# EAGLE board zeta2rework_lw_v35_rework (EAGLE 9.3.1)
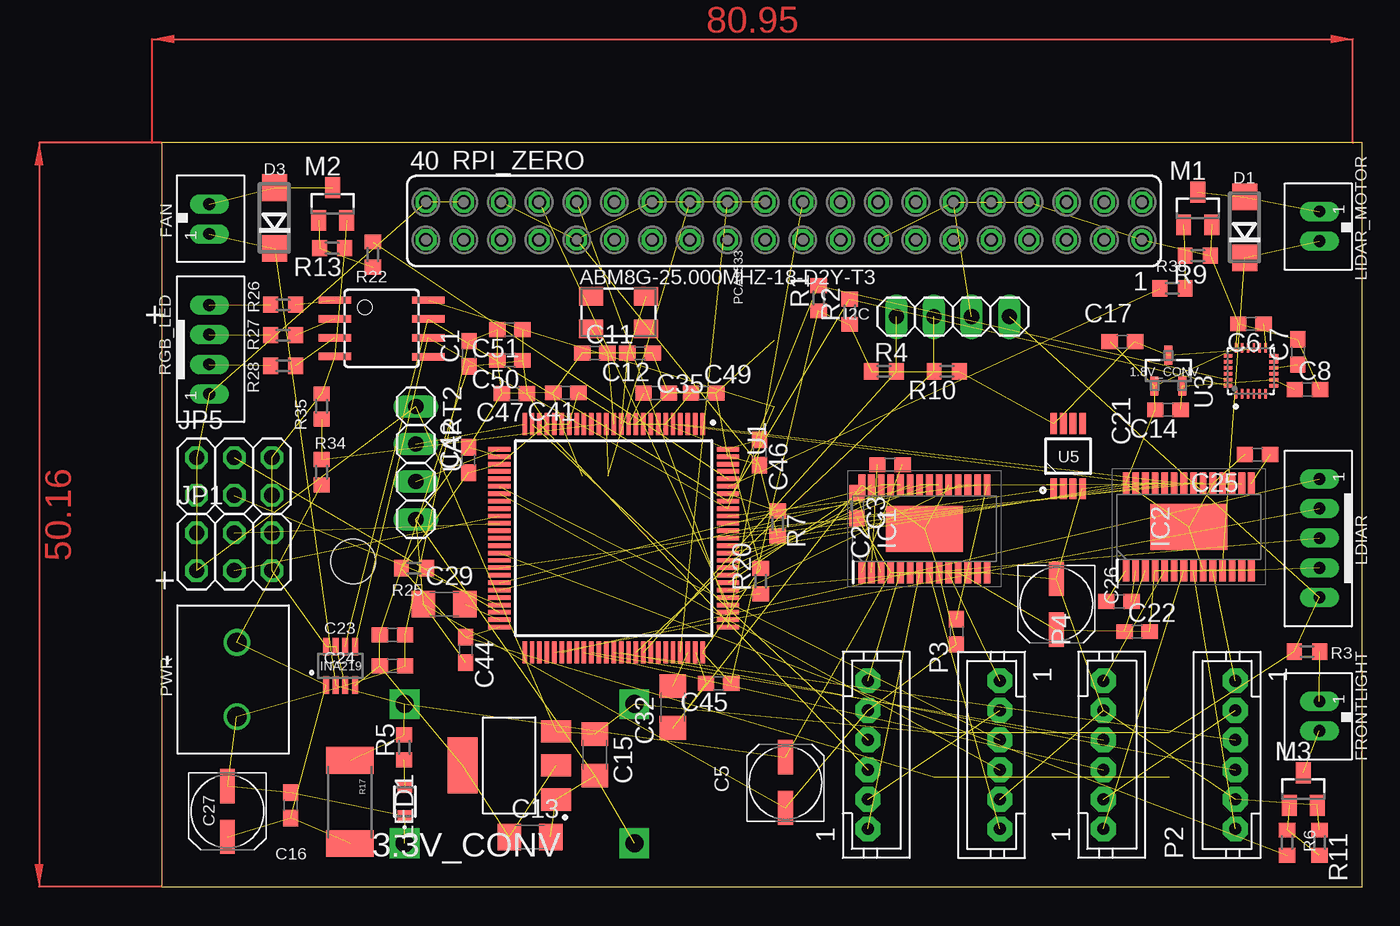
[diagram p0: board, top side]
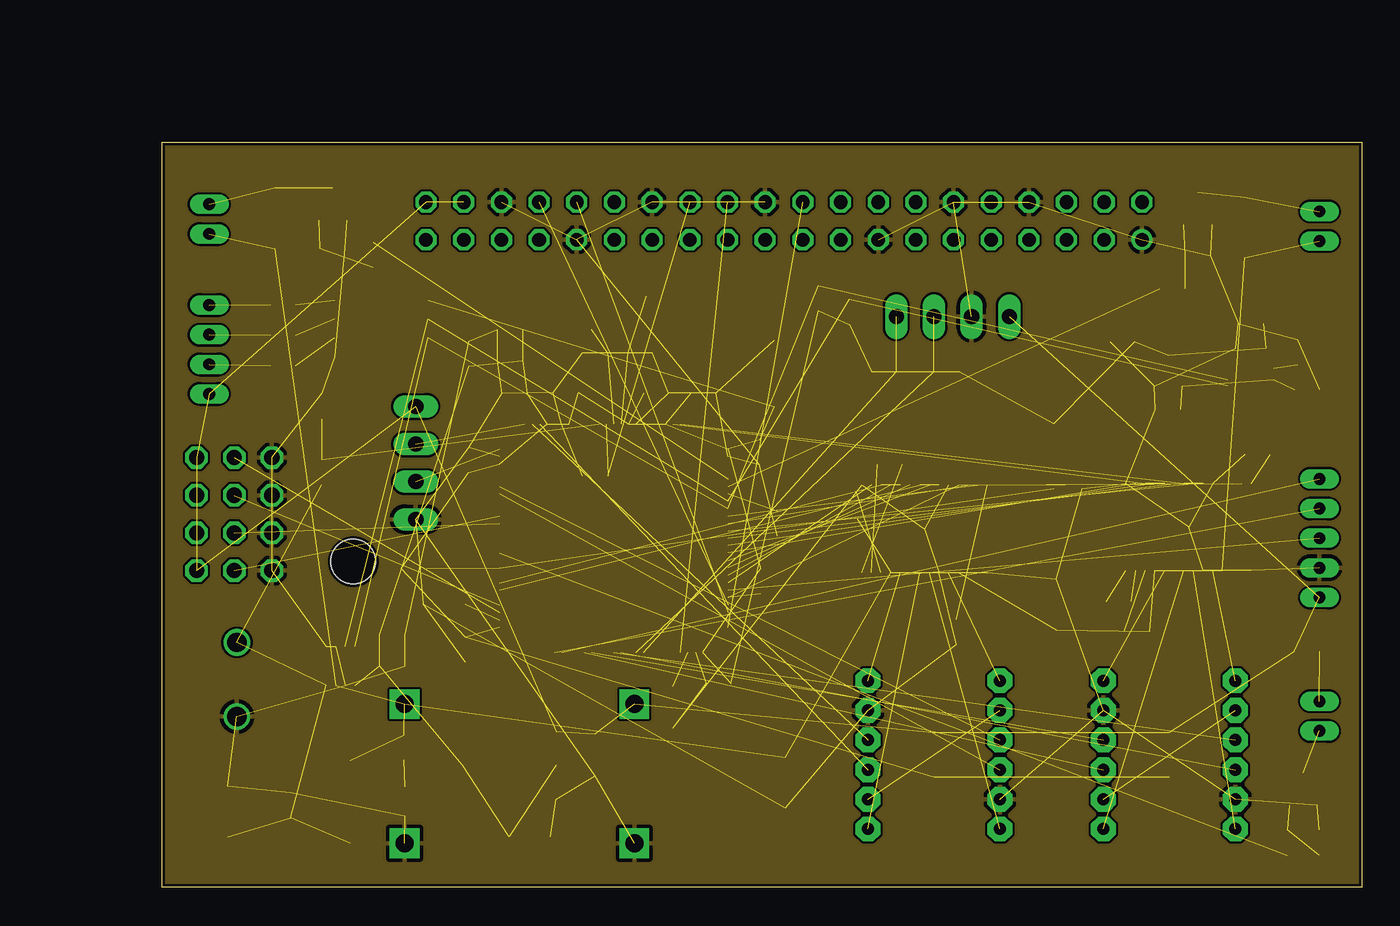
[diagram p1: board, inner layer Route2]
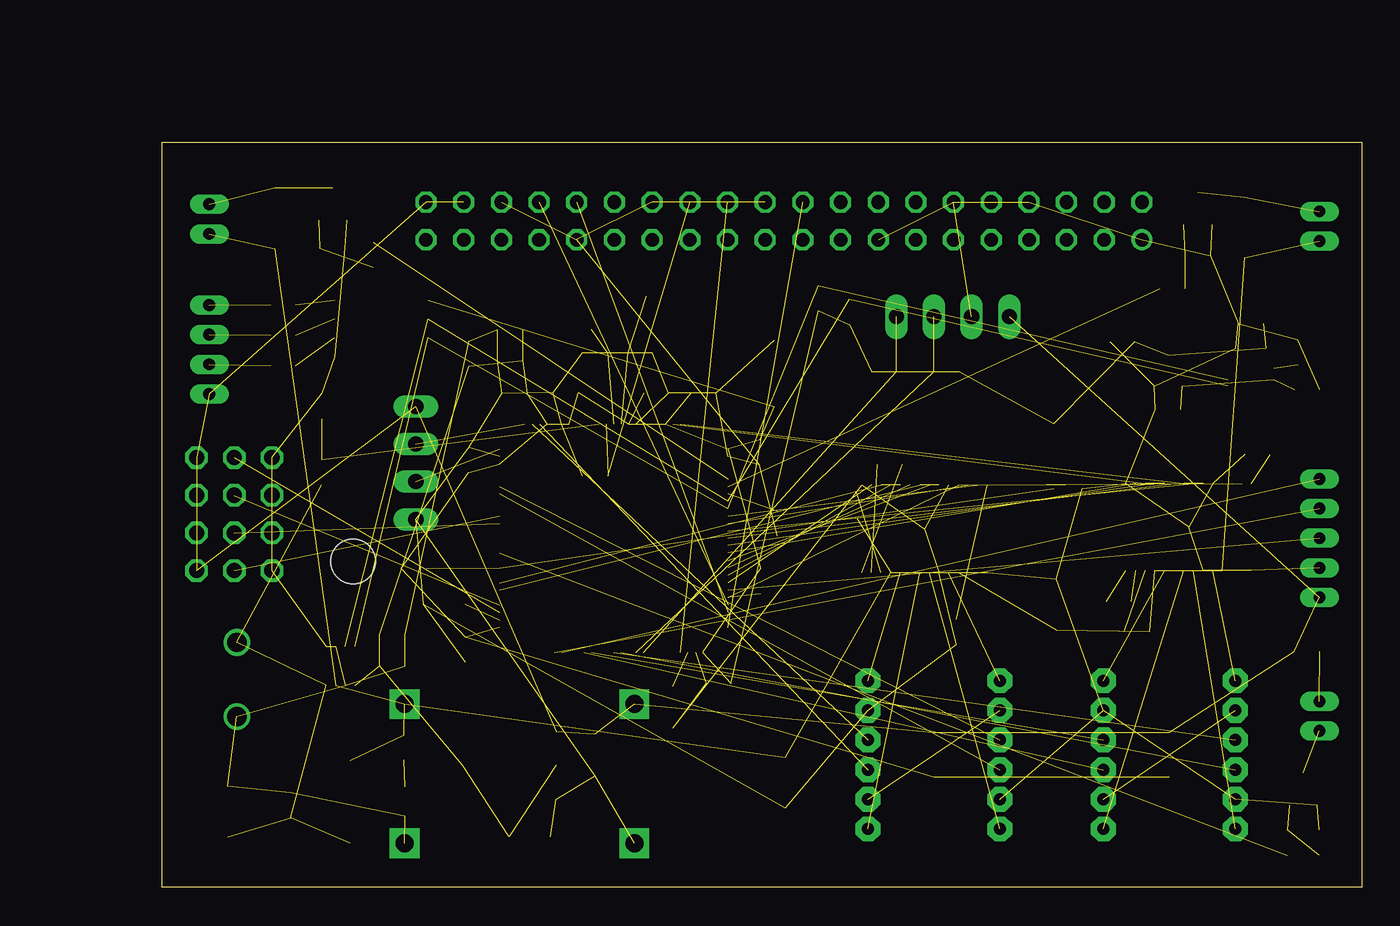
[diagram p2: board, inner layer Route15]
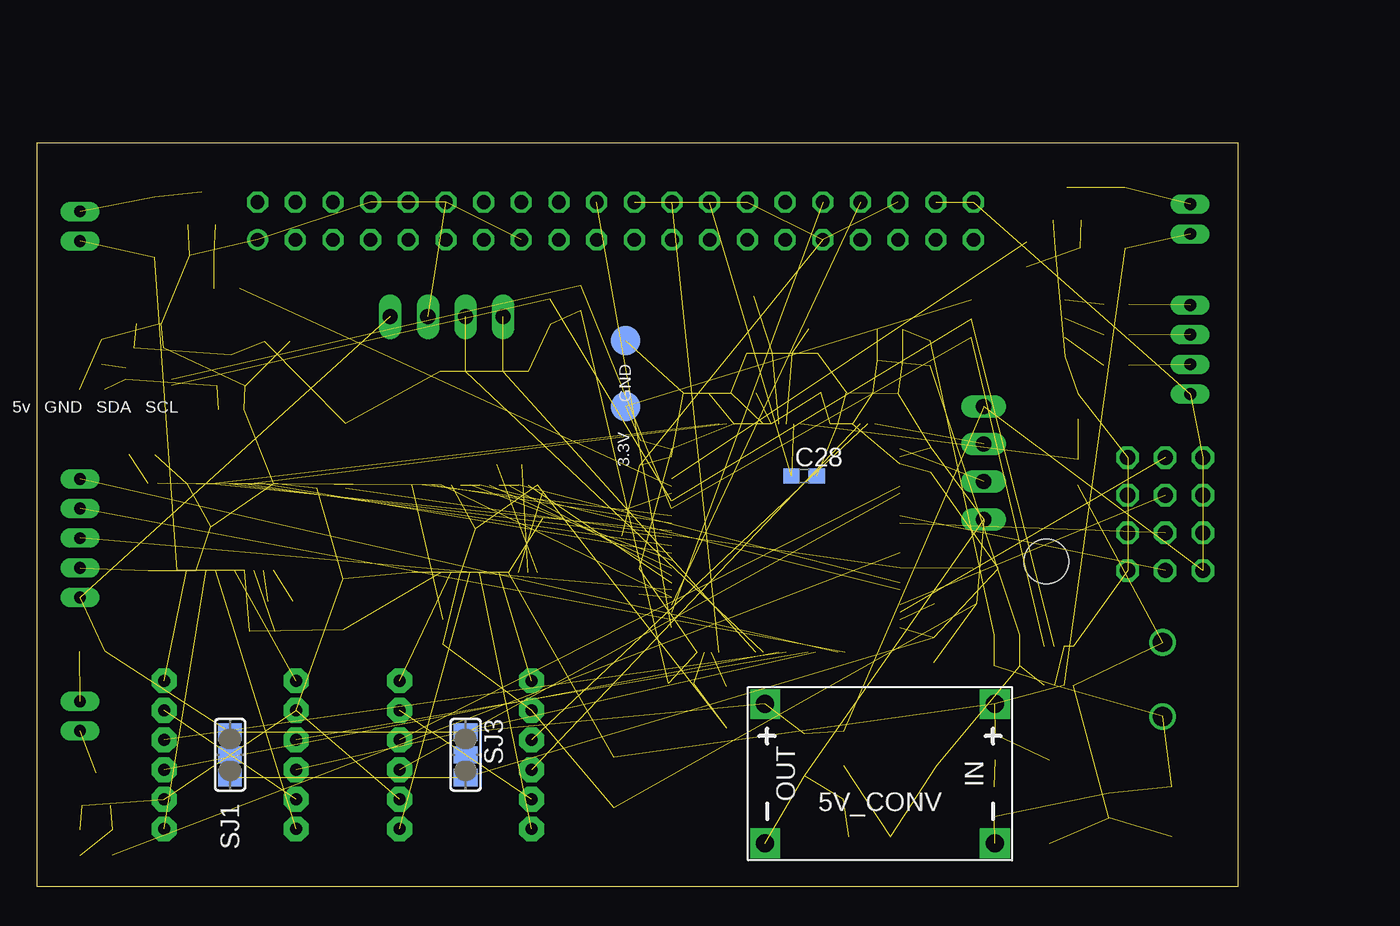
[diagram p3: board, bottom side, seen from below]

Size 80.95 x 50.16 mm. Coordinates in mm from the lower left corner, seen from the top.
Outline: 0,0 80.95,0 80.95,50.16 0,50.16 0,0
Copper layers (1*2*15*16): Top 0.035mm / dielectric 0.2mm / Route2 0.018mm / dielectric 1.5mm / Route15 0.018mm / dielectric 0.2mm / Bottom 0.035mm
Design rules "aisler_4_layer": minimum track width 0.1mm, minimum drill 0.2mm, track to track 0.1mm, track to pad 0.1mm, pad to pad 0.1mm, via to via 0.1mm, smd to smd 0.1mm, copper to edge 0.2mm, drill to drill 0.21mm, minimum pad ring 0.25mm, minimum via ring 0.15mm, stop-mask expansion 0mil, vias tented up to drill 0mil, thermal gap 10mil
Net classes: 0 default: clearance 0.152 mm
Holes 3 mm at 12.93,21.92

## Footprints (pad centres in the part's own frame; a part is rotated, then mirrored left to right if it is on the bottom)
SOT95P237X112-3N = smd 0.559 x 1.27: 1 -0.94,-1.041; 2 0.94,-1.041; 3 0,1.041
TP20R = smd 2 x 2: TP 0,0
SOT230P700X175-4N = smd 2 x 1.5: 1 -3.15,2.3; 2 -3.15,0; 3 -3.15,-2.3 | smd 2 x 3.8: 4 3.15,0
DC-DC-STEP-DOWN-MP2307 = drill 1.2 pad 2 square: IN+ -7.747,-4.699; IN- -7.747,4.699; OUT+ 7.747,-4.699; OUT- 7.747,4.699
5.0X3.2_KX-9A = smd 1.6 x 1.25: 1 -1.85,-1.1; 2 1.85,-1.1; 3 1.85,1.1; 4 -1.85,1.1
C0603 = smd 1.1 x 1: 1 -0.85,0; 2 0.85,0
UD-5X5,8_NICHICON = smd 2.3 x 1: + 1.725,0; - -1.7,0
C1206 = smd 1.6 x 1.8: 1 -1.4,0; 2 1.4,0
DO214AC = smd 1.8 x 1.7: A 2.05,0; C -2.05,0
JST_B2B-PH_HEADER = drill 0.8 long: P1 1.075,0.048; P2 -0.925,0.048
1X04 = drill 1.016 long: 1 -3.81,0; 2 -1.27,0; 3 1.27,0; 4 3.81,0
SOP65P640X120-29N = smd 1.475 x 0.45: 1 -2.938,4.225; 2 -2.938,3.575; 3 -2.938,2.925; 4 -2.938,2.275; 5 -2.938,1.625; 6 -2.938,0.975; 7 -2.938,0.325; 8 -2.938,-0.325; 9 -2.938,-0.975; 10 -2.938,-1.625; 11 -2.938,-2.275; 12 -2.938,-2.925; 13 -2.938,-3.575; 14 -2.938,-4.225; 15 2.938,-4.225; 16 2.938,-3.575; 17 2.938,-2.925; 18 2.938,-2.275; 19 2.938,-1.625; 20 2.938,-0.975; 21 2.938,-0.325; 22 2.938,0.325; 23 2.938,0.975; 24 2.938,1.625; 25 2.938,2.275; 26 2.938,2.925; 27 2.938,3.575; 28 2.938,4.225 | smd 3.1 x 5.18: 29 0,0
SOT23-8 = smd 0.4 x 1.2: 1 -0.975,-1.3; 2 -0.325,-1.3; 3 0.325,-1.3; 4 0.975,-1.3; 5 0.975,1.3; 6 0.325,1.3; 7 -0.325,1.3; 8 -0.975,1.3
2X03 = drill 1.016 octagon: 1 -2.54,-1.27; 2 -2.54,1.27; 3 0,-1.27; 4 0,1.27; 5 2.54,-1.27; 6 2.54,1.27
JST_B5B-PH_HEADER = drill 0.8 long: P1 4,0.048; P2 2,0.048; P3 0,0.048; P4 -2,0.048; P5 -4,0.048
LTM673-N1R2-25 = smd 0.8 x 1: 1 -1,0; 2 1,0
SOT23 = smd 1 x 1.4: 1 -0.95,-1.1; 2 0.95,-1.1; 3 0,1.1
JST-PH6 = drill 0.813 pad 1.676 octagon: 1 5,0; 2 3,0; 3 1,0; 4 -1,0; 5 -3,0; 6 -5,0
SOIC8 = smd 0.5 x 2.2: 1 -1.905,-3.154; 2 -0.645,-3.154; 3 0.625,-3.154; 4 1.895,-3.154; 5 1.905,3.154; 6 0.635,3.154; 7 -0.635,3.154; 8 -1.905,3.154
691137710002 = drill 1.3: 1 -2.5,0; 2 2.5,0
R0603 = smd 1 x 1.1: 1 -0.85,0; 2 0.85,0
2512 = smd 1.8 x 3.2: 1 -2.8,0; 2 2.8,0
JST_B4B-PH_HEADER = drill 0.8 long: P1 2.98,0.048; P2 0.98,0.048; P3 -1.02,0.048; P4 -3.02,0.048
FE20-2 = drill 0.914: 1 -24.13,1.27 | drill 0.914 octagon: 2 -24.13,-1.27; 3 -21.59,1.27; 4 -21.59,-1.27; 5 -19.05,1.27; 6 -19.05,-1.27; 7 -16.51,1.27; 8 -16.51,-1.27; 9 -13.97,1.27; 10 -13.97,-1.27; 11 -11.43,1.27; 12 -11.43,-1.27; 13 -8.89,1.27; 14 -8.89,-1.27; 15 -6.35,1.27; 16 -6.35,-1.27; 17 -3.81,1.27; 18 -3.81,-1.27; 19 -1.27,1.27; 20 -1.27,-1.27; 21 1.27,1.27; 22 1.27,-1.27; 23 3.81,1.27; 24 3.81,-1.27; 25 6.35,1.27; 26 6.35,-1.27; 27 8.89,1.27; 28 8.89,-1.27; 29 11.43,1.27; 30 11.43,-1.27; 31 13.97,1.27; 32 13.97,-1.27; 33 16.51,1.27; 34 16.51,-1.27; 35 19.05,1.27; 36 19.05,-1.27; 37 21.59,1.27; 38 21.59,-1.27; 39 24.13,1.27; 40 24.13,-1.27
SJ_2 = smd 1.168 x 1.6: 1 -1.524,0; 2 0,0; 3 1.524,0
QFP50P1600X1600X160-100N = smd 1.5 x 0.3: 1 -7.7,6; 2 -7.7,5.5; 3 -7.7,5; 4 -7.7,4.5; 5 -7.7,4; 6 -7.7,3.5; 7 -7.7,3; 8 -7.7,2.5; 9 -7.7,2; 10 -7.7,1.5; 11 -7.7,1; 12 -7.7,0.5; 13 -7.7,0; 14 -7.7,-0.5; 15 -7.7,-1; 16 -7.7,-1.5; 17 -7.7,-2; 18 -7.7,-2.5; 19 -7.7,-3; 20 -7.7,-3.5; 21 -7.7,-4; 22 -7.7,-4.5; 23 -7.7,-5; 24 -7.7,-5.5; 25 -7.7,-6; 51 7.7,-6; 52 7.7,-5.5; 53 7.7,-5; 54 7.7,-4.5; 55 7.7,-4; 56 7.7,-3.5; 57 7.7,-3; 58 7.7,-2.5; 59 7.7,-2; 60 7.7,-1.5; 61 7.7,-1; 62 7.7,-0.5; 63 7.7,0; 64 7.7,0.5; 65 7.7,1; 66 7.7,1.5; 67 7.7,2; 68 7.7,2.5; 69 7.7,3; 70 7.7,3.5; 71 7.7,4; 72 7.7,4.5; 73 7.7,5; 74 7.7,5.5; 75 7.7,6 | smd 0.3 x 1.5: 26 -6,-7.7; 27 -5.5,-7.7; 28 -5,-7.7; 29 -4.5,-7.7; 30 -4,-7.7; 31 -3.5,-7.7; 32 -3,-7.7; 33 -2.5,-7.7; 34 -2,-7.7; 35 -1.5,-7.7; 36 -1,-7.7; 37 -0.5,-7.7; 38 0,-7.7; 39 0.5,-7.7; 40 1,-7.7; 41 1.5,-7.7; 42 2,-7.7; 43 2.5,-7.7; 44 3,-7.7; 45 3.5,-7.7; 46 4,-7.7; 47 4.5,-7.7; 48 5,-7.7; 49 5.5,-7.7; 50 6,-7.7; 76 6,7.7; 77 5.5,7.7; 78 5,7.7; 79 4.5,7.7; 80 4,7.7; 81 3.5,7.7; 82 3,7.7; 83 2.5,7.7; 84 2,7.7; 85 1.5,7.7; 86 1,7.7; 87 0.5,7.7; 88 0,7.7; 89 -0.5,7.7; 90 -1,7.7; 91 -1.5,7.7; 92 -2,7.7; 93 -2.5,7.7; 94 -3,7.7; 95 -3.5,7.7; 96 -4,7.7; 97 -4.5,7.7; 98 -5,7.7; 99 -5.5,7.7; 100 -6,7.7
QFN40P300X300X105-25N = smd 0.64 x 0.22: 1 -1.545,1; 2 -1.545,0.6; 3 -1.545,0.2; 4 -1.545,-0.2; 5 -1.545,-0.6; 6 -1.545,-1; 13 1.545,-1; 14 1.545,-0.6; 15 1.545,-0.2; 16 1.545,0.2; 17 1.545,0.6; 18 1.545,1 | smd 0.22 x 0.64: 7 -1,-1.545; 8 -0.6,-1.545; 9 -0.2,-1.545; 10 0.2,-1.545; 11 0.6,-1.545; 12 1,-1.545; 19 1,1.545; 20 0.6,1.545; 21 0.2,1.545; 22 -0.2,1.545; 23 -0.6,1.545; 24 -1,1.545
SOP65P490X95-8N = smd 1.4 x 0.45: 1 -2.2,0.975; 2 -2.2,0.325; 3 -2.2,-0.325; 4 -2.2,-0.975; 5 2.2,-0.975; 6 2.2,-0.325; 7 2.2,0.325; 8 2.2,0.975

## Placement (x,y rotation side)
1.8V_CONV  MCP1700T-1802E/TT  [SOT95P237X112-3N]  67.87,34.8 0 top
3.3V  TPSQTP20R  [TP20R]  41.27,32.38 90 bottom
3.3V_CONV  NCP1117LPST33T3G  [SOT230P700X175-4N]  23.44,8.18 180 top
5V_CONV  DC-DC-STEP-DOWN-MP2307  [DC-DC-STEP-DOWN-MP2307]  24.13,7.62 180 bottom
ABM8G-25.000MHZ-18-D2Y-T3  25mhz  [5.0X3.2_KX-9A]  30.81,38.71 0 top
C1  4.7µf  [C0603]  20.73,35.94 90 top
C2  0.01µf 100v  [C0603]  49.11,28.45 180 top
C3  0.1µF 16v  [C0603]  46.89,25.69 270 top
C4  0.47µF 6.3v  [C0603]  53.59,17.18 270 top
C5  47µF  [UD-5X5,8_NICHICON]  42.06,7.01 90 top
C6  0.1nF  [C0603]  73.43,37.95 180 top
C7  0.1nF  [C0603]  76.61,36.05 90 top
C8  0.1nF  [C0603]  77.24,33.51 0 top
C11  Xpf  [C0603]  29.21,35.97 0 top
C12  Xpf  [C0603]  32.26,35.97 180 top
C13  10µF  [C1206]  24.84,3.35 0 top
C14  1µF  [C0603]  67.84,32.16 180 top
C15  10µF  [C1206]  29.21,8.89 270 top
C16  0.1µF  [C0603]  8.71,5.49 90 top
C17  1µF  [C0603]  64.77,36.75 180 top
C21  0.01µf 100v  [C0603]  64.54,19.23 0 top
C22  0.1µF 16v  [C0603]  65.76,17.2 0 top
C23  100nf  [C0603]  15.57,16.97 0 top
C24  0.1µF  [C0603]  15.57,14.88 0 top
C25  0.47µF 6.3v  [C0603]  73.88,29.13 180 top
C26  47µF  [UD-5X5,8_NICHICON]  60.33,19.05 270 top
C27  100µF  [UD-5X5,8_NICHICON]  4.45,5.08 270 top
C28  100nF  [C0603]  29.25,27.69 0 bottom
C29  2.2µf Low ESR < 2ohm  [C1206]  19.05,19.05 0 top
C32  2.2µf Low ESR < 2ohm  [C1206]  34.47,12.12 90 top
C35  100nF  [C0603]  33.34,33.27 0 top
C41  100nF  [C0603]  27.25,33.3 180 top
C42  100nF  [C0603]  20.7,28.77 90 top
C44  100nF  [C0603]  20.5,15.96 270 top
C45  100nF  [C0603]  37.55,13.72 180 top
C46  100nF  [C0603]  40.31,29.27 270 top
C47  100nF  [C0603]  23.79,33.25 180 top
C49  100nF  [C0603]  36.54,33.27 0 top
C50  100nF  [C0603]  23.48,35.48 180 top
C51  1µf  [C0603]  23.48,37.57 180 top
D1  1N4004 SMD  [DO214AC]  73.03,44.45 90 top
D3  1N4004 SMD  [DO214AC]  7.62,45.09 90 top
FAN  JST-PH_2-PIN_HEADER  [JST_B2B-PH_HEADER]  3.17,45.09 270 top
FRONTLIGHT  JST-PH_2-PIN_HEADER  [JST_B2B-PH_HEADER]  78.11,11.43 90 top
GND  TPSQTP20R  [TP20R]  41.27,36.83 90 bottom
I2C  [1X04]  53.34,38.43 0 top
IC1  DRV8844PWPR  [SOP65P640X120-29N]  51.44,24.13 90 top
IC2  DRV8844PWPR  [SOP65P640X120-29N]  69.24,24.26 90 top
INA219  INA219  [SOT23-8]  12.06,14.88 0 top
JP1  [2X03]  4.9,22.58 0 top
JP5  [2X03]  4.9,27.66 0 top
LDIAR  JST-PH_5-PIN_HEADER  [JST_B5B-PH_HEADER]  78.11,23.5 90 top
LED1  LT M673  [LTM673-N1R2-25]  16.41,5.74 90 top
LIDAR_MOTOR  JST-PH_2-PIN_HEADER  [JST_B2B-PH_HEADER]  78.11,44.45 90 top
M1  IRLML2502  [SOT23]  69.85,45.72 0 top
M2  IRLML2502  [SOT23]  11.53,46.02 0 top
M3  IRLML2502  [SOT23]  76.96,6.58 0 top
P1  [JST-PH6]  56.52,8.89 90 top
P2  [JST-PH6]  72.39,8.89 90 top
P3  [JST-PH6]  47.62,8.89 270 top
P4  [JST-PH6]  63.5,8.89 270 top
PCA9533  PCA9533  [SOIC8]  14.83,37.64 270 top
PWR  691137710002  [691137710002]  5.08,13.97 270 top
R1  10k  [R0603]  44.3,39.67 90 top
R2  10k  [R0603]  46.38,38.76 90 top
R3  0R  [R0603]  77.22,15.85 0 top
R4  10k  [R0603]  48.69,34.75 0 top
R5  390R  [R0603]  16.36,9.4 90 top
R6  22R  [R0603]  75.87,2.97 90 top
R7  10k  [R0603]  41.53,24.49 270 top
R9  100k  [R0603]  69.85,42.55 180 top
R10  10k  [R0603]  52.93,34.75 180 top
R11  100k  [R0603]  78.05,2.97 270 top
R13  100k  [R0603]  11.51,43.05 180 top
R17  0.1/1% (PT2512FK-070R1L)  [2512]  12.7,5.71 270 top
R20  100k  [R0603]  40.39,20.6 90 top
R22  22R  [R0603]  14.25,42.62 270 top
R25  4k7  [R0603]  17.02,21.46 180 top
R26  220R  [R0603]  8.2,39.24 180 top
R27  220R  [R0603]  8.2,37.19 180 top
R28  220R  [R0603]  8.2,35.13 180 top
R34  100k  [R0603]  10.79,27.94 270 top
R35  69k  [R0603]  10.79,32.38 270 top
R38  22R  [R0603]  68.15,40.34 0 top
RGB_LED  JST-PH_4-PIN_HEADER  [JST_B4B-PH_HEADER]  3.17,36.2 270 top
RPI_ZERO  [FE20-2]  41.96,44.88 180 top
SJ1  [SJ_2]  67.94,8.89 270 bottom
SJ3  [SJ_2]  52.07,8.89 270 bottom
U1  STM32F427VI  [QFP50P1600X1600X160-100N]  30.48,23.5 270 top
U3  ICM-20948  [QFN40P300X300X105-25N]  73.43,34.78 90 top
U5  DS18B20U+  [SOP65P490X95-8N]  61.11,29.03 90 top
UART2  [1X04]  17.14,28.58 270 top

## Library data of the parts
1.8V_CONV = MCP1700T-2102E_TT; AVAILABILITY: Unavailable; DESCRIPTION: 250mA CMOS LDO, Isupply 1uA and 2% VoutAccuracy; MF: Microchip; MP: MCP1700T-2102E/TT; PACKAGE: SOT-23 Microchip; PRICE: None
3.3V GND = testpad
3.3V_CONV = NCP1117LPST33T3G; AVAILABILITY: Unavailable; DESCRIPTION: Linear Voltage Regulator, Positive, LDO, 1.0 A _Fixed and Adjustable_ Vout: 3.3 V; MF: ON Semiconductor; MP: NCP1117LPST33T3G; PACKAGE: SOT-223 ON Semiconductor; PRICE: None
5V_CONV = diy-modules
ABM8G-25.000MHZ-18-D2Y-T3 = crystal-geyer_V1_0
C1-C8 C11-C17 C21-C29 C32 C35 C41 C42 C44-C47 C49-C51 = rcl; SPICEPREFIX: C
D1 D3 = diode
FAN FRONTLIGHT LDIAR LIDAR_MOTOR RGB_LED = srg
I2C JP1 JP5 UART2 = pinhead
IC1 IC2 = DRV8844PWPR; DESCRIPTION: 5A Brushed DC motor or Quad 1.75A Solenoid/Relay Driver with +/-30V split supply support (PWM Ctrl); HEIGHT: 1.2mm; MANUFACTURER_NAME: Texas Instruments; MANUFACTURER_PART_NUMBER: DRV8844PWPR; MOUSER_PART_NUMBER: 595-DRV8844PWPR; MOUSER_PRICE-STOCK: https://www.mouser.com/Search/Refine.aspx?Keyword=595-DRV8844PWPR
INA219 = INA219; AVAILABILITY: Unavailable; DESCRIPTION: the ina219 is a high-side current shunt and power monitor with an i2c interface. the ina219 monitors both shunt drop ...; MF: Texas Instruments; MP: INA219; PACKAGE: None; PRICE: None
LED1 = LT_M673-N1R2-25; DESCRIPTION: Osram Opto LT M673-N1R2-25, Mini TOPLED Series Green LED, 529 nm,, Rectangle Lens SMD Package; HEIGHT: mm; MANUFACTURER_NAME: OSRAM Opto Semiconductors; MANUFACTURER_PART_NUMBER: LT M673-N1R2-25; MOUSER_PART_NUMBER: 720-LTM673N1R225Z; MOUSER_PRICE-STOCK: https://www.mouser.com/Search/Refine.aspx?Keyword=720-LTM673N1R225Z; RS_PART_NUMBER: 9133231; RS_PRICE-STOCK: http://uk.rs-online.com/web/p/products/9133231
M1-M3 = IRLML2502TRPBF; AVAILABILITY: Unavailable; DESCRIPTION: Single N-Channel 20 V 0.08 Ohm 12 nC 1.25 W Silicon SMT Mosfet - SOT-23; MF: Infineon; MP: IRLML2502TRPBF; PACKAGE: SOT-23-3 Infineon; PRICE: None
P1-P4 = jst-ph
PCA9533 = adam - ics
PWR = term block; AVAILABILITY: Unavailable; DESCRIPTION: Term Block 2pos Side Entry 5mm; MF: Wurth Electronics; MP: 691137710002; PACKAGE: None; PRICE: None
R1-R7 R9-R11 R13 R20 R22 R25-R28 R34 R35 R38 = rcl; SPICEPREFIX: R
R17 = microbuilder
RPI_ZERO = con-lsta; OC_FARNELL: unknown; OC_NEWARK: unknown
SJ1 SJ3 = jumper
U1 = STM32F427VGT7; AVAILABILITY: Unavailable; DESCRIPTION: Ic Mcu 32bit 1mb Flash 100lqfp; MF: STMicroelectronics; MP: STM32F427VGT7; PACKAGE: LQFP-100 STMicroelectronics; PRICE: None
U3 = ICM-20948; AVAILABILITY: Unavailable; DESCRIPTION: 9 Axis=3 Axis Gyro+3 Axis Accel+Compass. Pin For Pin With m; MF: TDK InvenSense; MP: ICM-20948; PACKAGE: QFN-24 InvenSense; PRICE: None
U5 = DS18B20U_; AVAILABILITY: Unavailable; DESCRIPTION: Date Code: 1043+; RoHS Compliant: Yes;; MF: Maxim; MP: DS18B20U+; PACKAGE: TSSOP-8 Chip Coolers; PRICE: None

## Nets
+1.8V: 1.8V_CONV.2 C8.1 C14.1 U3.8
+3V3: 1.8V_CONV.3 3.3V.TP 3.3V_CONV.2 3.3V_CONV.4 C1.1 C6.1 C13.1 C17.1 C23.1 C24.1 C35.1 C41.1 C42.1 C44.1 C45.1 C46.1 C47.1 C49.1 C50.1 C51.1 INA219.4 PCA9533.8 R1.1 R2.1 R4.1 R10.1 R20.2 R25.2 SJ1.3 SJ3.3 U1.6 U1.11 U1.19 U1.21 U1.22 U1.28 U1.50 U1.75 U1.100 U3.13 U5.8
+5V: 3.3V_CONV.3 5V_CONV.OUT+ C15.1 I2C.4 JP1.1 JP1.2 JP5.1 JP5.2 LDIAR.P5 R3.1 RGB_LED.P1 RPI_ZERO.38 RPI_ZERO.40 SJ1.1 SJ3.1 UART2.1
+8V: 5V_CONV.IN+ C3.2 C5.+ C22.2 C26.+ D1.C D3.C FAN.P1 IC1.4 IC1.11 IC2.4 IC2.11 INA219.2 LIDAR_MOTOR.P2 R5.2 R17.1
BAT_LVL: R34.1 R35.2 U1.15
DEC_LB_1: P1.3 U1.31
DEC_LB_2: P1.4 U1.32
DEC_LF_1: P3.3 U1.23
DEC_LF_2: P3.4 U1.24
DEC_RB_1: P2.3 U1.63
DEC_RB_2: P2.4 U1.64
DEC_RF_1: P4.3 U1.59
DEC_RF_2: P4.4 U1.60
GND: 1.8V_CONV.1 3.3V_CONV.1 5V_CONV.IN- 5V_CONV.OUT- C1.2 C4.2 C5.- C6.2 C7.2 C8.2 C11.1 C12.1 C13.2 C14.2 C15.2 C16.2 C17.2 C23.2 C24.2 C25.2 C26.- C27.- C28.2 C29.1 C32.1 C35.2 C41.2 C42.2 C44.2 C45.2 C46.2 C47.2 C49.2 C50.2 C51.2 GND.TP I2C.3 IC1.6 IC1.9 IC1.14 IC1.19 IC1.28 IC1.29 IC2.6 IC2.9 IC2.14 IC2.19 IC2.28 IC2.29 INA219.3 INA219.7 INA219.8 JP1.5 JP1.6 JP5.5 JP5.6 LDIAR.P4 LED1.1 M1.2 M2.2 M3.2 P1.5 P2.5 P3.5 P4.5 PCA9533.4 PWR.2 R7.2 R9.1 R11.1 R13.1 R35.1 RPI_ZERO.1 RPI_ZERO.8 RPI_ZERO.12 RPI_ZERO.15 RPI_ZERO.22 RPI_ZERO.28 RPI_ZERO.31 RPI_ZERO.36 U1.10 U1.20 U1.27 U1.74 U1.99 U3.18 U5.4 UART2.4
I2C1_SCL: INA219.5 PCA9533.6 R1.2 U1.92 U3.23
I2C1_SDA: INA219.6 PCA9533.7 R2.2 U1.93 U3.24
I2C3_SCL: I2C.1 R4.2 U1.67
I2C3_SDA: I2C.2 R10.2 U1.66
LIDAR_POS_INT: LDIAR.P3 U1.81
M_LB_IN1: IC1.23 U1.84
M_LB_IN2: IC1.21 U1.85
M_LF_IN1: IC1.27 U1.82
M_LF_IN2: IC1.25 U1.83
M_PWM_LB: IC1.20 IC1.22 U1.45
M_PWM_LF: IC1.24 IC1.26 U1.44
M_PWM_RB: IC2.20 IC2.22 U1.4
M_PWM_RF: IC2.24 IC2.26 U1.5
M_RB_IN1: IC2.23 U1.88
M_RB_IN2: IC2.21 U1.89
M_RESET: IC1.16 IC2.16 U1.91
M_RF_IN1: IC2.27 U1.86
M_RF_IN2: IC2.25 U1.87
M_SLEEP: IC1.17 IC2.17 U1.90
N$1: C21.2 IC2.2
N$2: C21.1 IC2.1
N$3: C22.1 IC2.3
N$4: IC2.10 P2.1
N$6: FRONTLIGHT.P1 R3.2
N$7: LED1.2 R5.1
N$8: C7.1 U3.10
N$9: FRONTLIGHT.P2 M3.3
N$10: M3.1 R6.2 R11.2
N$11: IC2.5 P4.6
N$12: IC2.7 P4.1
N$13: ABM8G-25.000MHZ-18-D2Y-T3.1 C11.2 U1.13
N$14: IC1.5 P3.6
N$16: R7.1 U1.94
N$18: C2.2 IC1.2
N$19: IC2.8 P2.6
N$20: C2.1 IC1.1
N$21: C3.1 IC1.3
N$22: PCA9533.1 R26.1
N$23: PCA9533.2 R27.1
N$24: PCA9533.3 R28.1
N$26: C25.1 IC2.15
N$27: IC1.7 P3.1
N$28: IC1.8 P1.6
N$29: C4.1 IC1.15
N$30: IC1.10 P1.1
N$31: R26.2 RGB_LED.P4
N$32: P2.2 P4.2 SJ1.2
N$33: R27.2 RGB_LED.P3
N$35: R28.2 RGB_LED.P2
N$36: C29.2 U1.49
N$37: M2.1 R13.2 R22.2
N$38: M1.1 R9.2 R38.2
N$39: D1.A LIDAR_MOTOR.P1 M1.3
N$41: P1.2 P3.2 SJ3.2
N$44: ABM8G-25.000MHZ-18-D2Y-T3.3 C12.2 U1.12
N$45: C32.2 U1.73
N$55: D3.A FAN.P2 M2.3
NFAULT: IC1.18 IC2.18 R20.1 U1.80
NRST: C28.1 RPI_ZERO.26 U1.14
PWM1: JP5.3 U1.47
PWM2: JP5.4 U1.48
PWM3: JP1.3 U1.35
PWM4: JP1.4 U1.36
PWM_FAN: R22.1 U1.96
PWM_LIDAR: R38.1 U1.95
PWM_LIGHT: R6.1 U1.40
SWCLK: RPI_ZERO.20 U1.76
SWDIO: RPI_ZERO.24 U1.72
TEMPERATURE: R25.1 U1.42 U5.1
UART2_RX: U1.26 UART2.3
UART2_TX: U1.25 UART2.2
UART3_RX: LDIAR.P1 U1.56
UART3_TX: LDIAR.P2 U1.55
UART4_RX: RPI_ZERO.34 U1.79
UART4_TX: RPI_ZERO.32 U1.78
USB_OTG_DM: U1.70
USB_OTG_DP: U1.71
USB_OTG_ID: U1.69
USB_OTG_VBUS: U1.68
V+: C16.1 C27.+ INA219.1 PWR.1 R17.2 R34.2

## Tracks (layer width: path | path; a pad name or v marks a point on that pad's centre or on a via)
+1.8V  (3 unrouted)
+3V3  (40 unrouted)
+5V  (15 unrouted)
+8V  (15 unrouted)
BAT_LVL  (2 unrouted)
DEC_LB_1  (1 unrouted)
DEC_LB_2  (1 unrouted)
DEC_LF_1  (1 unrouted)
DEC_LF_2  (1 unrouted)
DEC_RB_1  (1 unrouted)
DEC_RB_2  (1 unrouted)
DEC_RF_1  (1 unrouted)
DEC_RF_2  (1 unrouted)
GND  (87 unrouted)
  cutout Top: 70.89,31.6 75.97,31.6 arc90 76.61,32.24 76.61,37.32 arc90 75.97,37.95 70.89,37.95 arc90 70.26,37.32 70.26,32.24 arc90
  cutout Bottom: 70.26,36.68 70.26,32.24 arc90 70.89,31.6 75.97,31.6 arc90 76.61,32.24 76.61,36.68 arc90 75.97,37.95 70.89,37.95 arc90
  pour Route2: -3.81,52.07 -3.81,-1.91 85.72,-1.91 85.72,52.07
I2C1_SCL  (4 unrouted)
I2C1_SDA  (4 unrouted)
I2C3_SCL  (2 unrouted)
I2C3_SDA  (2 unrouted)
LIDAR_POS_INT  (1 unrouted)
M_LB_IN1  (1 unrouted)
M_LB_IN2  (1 unrouted)
M_LF_IN1  (1 unrouted)
M_LF_IN2  (1 unrouted)
M_PWM_LB  (2 unrouted)
M_PWM_LF  (2 unrouted)
M_PWM_RB  (2 unrouted)
M_PWM_RF  (2 unrouted)
M_RB_IN1  (1 unrouted)
M_RB_IN2  (1 unrouted)
M_RESET  (2 unrouted)
M_RF_IN1  (1 unrouted)
M_RF_IN2  (1 unrouted)
M_SLEEP  (2 unrouted)
N$1  (1 unrouted)
N$2  (1 unrouted)
N$3  (1 unrouted)
N$4  (1 unrouted)
N$6  (1 unrouted)
N$7  (1 unrouted)
N$8  (1 unrouted)
N$9  (1 unrouted)
N$10  (2 unrouted)
N$11  (1 unrouted)
N$12  (1 unrouted)
N$13  (2 unrouted)
N$14  (1 unrouted)
N$16  (1 unrouted)
N$18  (1 unrouted)
N$19  (1 unrouted)
N$20  (1 unrouted)
N$21  (1 unrouted)
N$22  (1 unrouted)
N$23  (1 unrouted)
N$24  (1 unrouted)
N$26  (1 unrouted)
N$27  (1 unrouted)
N$28  (1 unrouted)
N$29  (1 unrouted)
N$30  (1 unrouted)
N$31  (1 unrouted)
N$32  (2 unrouted)
N$33  (1 unrouted)
N$35  (1 unrouted)
N$36  (1 unrouted)
N$37  (2 unrouted)
N$38  (2 unrouted)
N$39  (2 unrouted)
N$41  (2 unrouted)
N$44  (2 unrouted)
N$45  (1 unrouted)
N$55  (2 unrouted)
NFAULT  (3 unrouted)
NRST  (2 unrouted)
PWM1  (1 unrouted)
PWM2  (1 unrouted)
PWM3  (1 unrouted)
PWM4  (1 unrouted)
PWM_FAN  (1 unrouted)
PWM_LIDAR  (1 unrouted)
PWM_LIGHT  (1 unrouted)
SWCLK  (1 unrouted)
SWDIO  (1 unrouted)
TEMPERATURE  (2 unrouted)
UART2_RX  (1 unrouted)
UART2_TX  (1 unrouted)
UART3_RX  (1 unrouted)
UART3_TX  (1 unrouted)
UART4_RX  (1 unrouted)
UART4_TX  (1 unrouted)
V+  (5 unrouted)
  pour Route15: -17.14,33.66 -17.14,29.84 -13.34,29.84 -13.34,33.66
(copper drawn outside any net)
  shapes: Top area x2

## Text on the board
tNames: + | - +
bNames: ζ2 Motherboard | 5v GND SDA SCL